# Altium PCB INA240_Breakout.PcbDoc
Units mil, origin at the board's own origin, x right, y up, seen from the top; angles counter-clockwise.
Board outline 1025 x 575 mil, 2 copper layers (Top Layer, Bottom Layer); 5 components, 7 nets, 19 pads, 0 vias.
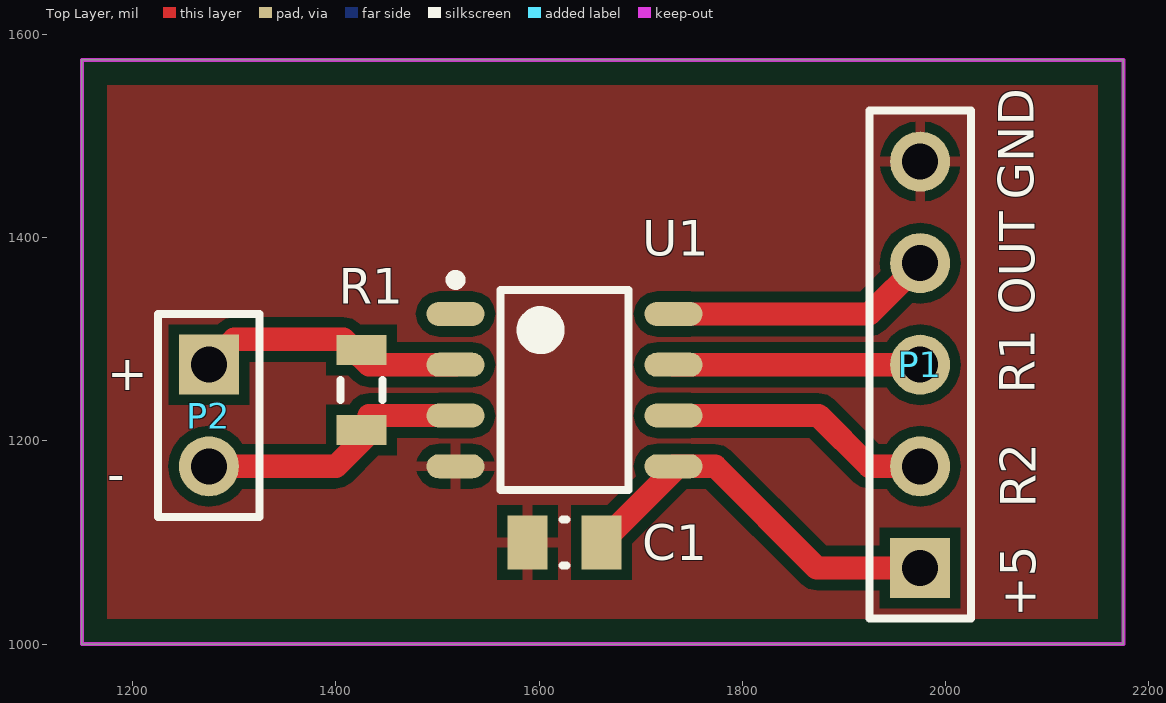
[diagram p0: Top Layer view]
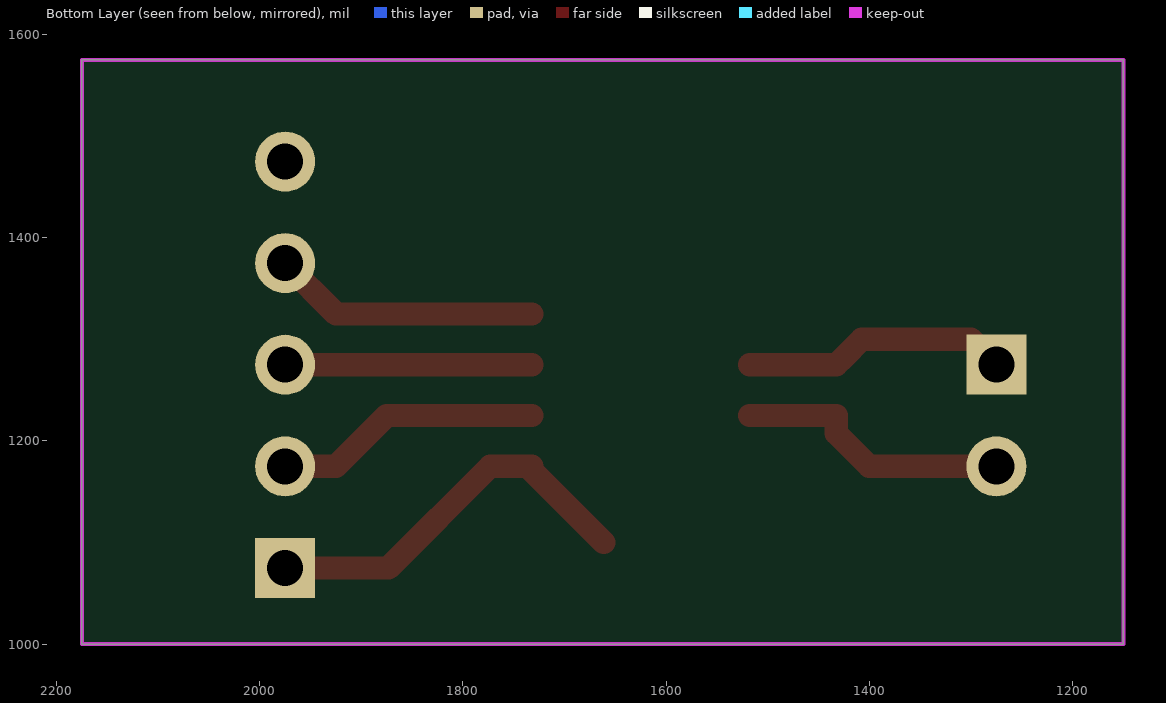
[diagram p1: Bottom Layer view, seen from below]
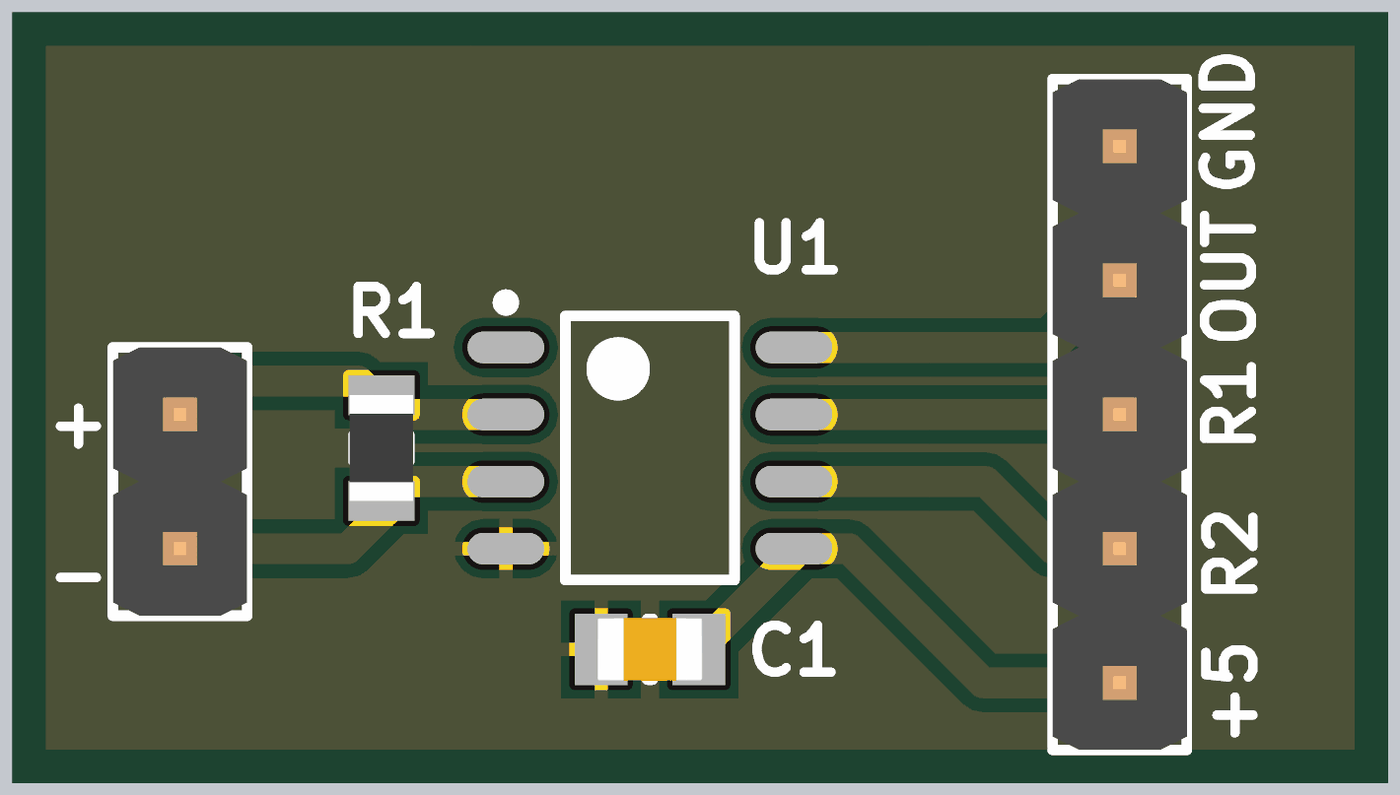
[diagram p2: 3D render of the assembled board from above, using the file's embedded part models]

## Layer stack, top to bottom
Top Solder: solder mask 0.4, Solder Resist, Dk 3.5
Top Layer: signal copper 1.4
Dielectric 1: dielectric 12.6, FR-4, Dk 4.8
Bottom Layer: signal copper 1.4
Bottom Solder: solder mask 0.4, Solder Resist, Dk 3.5

## Board outline
1150,1000 2175,1000 2175,1575 1150,1575

## Design rules (kind name [scope] priority, off if disabled: settings)
Clearance [All] p1: gap=10 ignorepadtopadclearanceinfootprint=FALSE except(0: Arc-Hole Track-Hole SMDPad-Hole THPad-Hole Via-Hole Fill-Hole Poly-Hole Region-Hole Text-Hole)
PolygonConnect [All] p1: connectstyle=Relief reliefconductorwidth=10 reliefentries=4 polygonreliefangle="90 Angle" airgapwidth=10
RoutingVias [All] p1: holewidth=28 width=50 viastyle="Through Hole" minholewidth=28 minwidth=50 maxholewidth=28 maxwidth=50
SolderMaskExpansion [All] p1: expansion=4 istentingtop=FALSE
Width [All] p1: maxlimit=50 minlimit=10 preferedwidth=10 minimp=50.000000 maximp=50.000000 favimp=50.000000
30 further rules are at their usual default settings.

## Components (designator, comment, footprint, x,y, rotation, side; value= is the part's Value field where it differs from the comment)
C1 "Capacitor - Nonpolarized" "0805 - Capacitor" 1625,1100 r0 top value=100nF
P1 "1x5 Header" HDR1X5 1975,1075 r90 top
P2 "1x2 Header" HDR1X2 1275,1275 r270 top
R1 "Resistor" "0805 - Resistor" 1425,1250 r270 top value=100m
U1 "INA240" INA240 1625,1250 r0 top

## Footprints (in the part's own frame and the unit in brackets; to place one, negate y for a bottom-side part, rotate by r counter-clockwise, add the part's x,y. Pads: shape width x height; smd on the part's side, far side on the other; paste and mask are expansions set on the pad)
"0805 - Capacitor" [mm] "0805 Chip Capacitor - IPC Medium Density"
  rect 1x1.35 smd: 1(-0.925,0) 2(0.925,0)
  silkscreen extent -0.05,-0.58 0.05,0.58, body extent -1,-0.6 1,0.6, height 1.2
"0805 - Resistor" [mm] "0805 Chip Resistor - IPC Medium Density"
  rect 0.75x1.25 smd: 1(-1,0) 2(1,0)
  silkscreen extent -0.25,-0.53 0.25,0.53, body extent -1,-0.6 1,0.6, height 0.5
HDR1X2 [mm] "Connector; Header; 2 Position"
  rect 1.5x1.5 hole 0.9: 1(0,0)
  round 1.5 hole 0.9: 2(2.54,0)
  silkscreen extent -1.27,-1.27 3.81,1.27, body extent -1.27,-1.27 3.81,1.27, height 8.54
HDR1X5 [mm] "Connector; Header; 5 Position"
  rect 1.5x1.5 hole 0.9: 1(0,0)
  round 1.5 hole 0.9: 2(2.54,0) 3(5.08,0) 4(7.62,0) 5(10.16,0)
  silkscreen extent -1.27,-1.27 11.43,1.27, body extent -1.27,-1.27 11.43,1.27, height 8.54
INA240 [mm] "SOIC, 8-Leads, Body 4.91x3.90mm, Pitch 1.27mm, IPC Medium Density"
  oval 1.45x0.6 smd: 1(-2.725,1.905) 2(-2.725,0.635) 3(-2.725,-0.635) 4(-2.725,-1.905) 5(2.725,-1.905) 6(2.725,-0.635) 7(2.725,0.635) 8(2.725,1.905)
  silkscreen extent -2.85,-2.5 1.6,2.88, body extent -2,-2.5 2,2.5, height 1.75

## Part data
C1: "Nonpolarized Capacitor", Manufacturer=Yageo, Manufacturer Part Number=CC0805KRX7R9BB104, Supplier Part Number=311-1140-1-ND
P1: "1x5 Pin Header"
P2: "1x2 Pin Header"
R1: Manufacturer=CTS, Manufacturer Part Number=73L3R10J, Supplier Part Number=73L3R10JCT-ND
U1: "-4V to 80V Current Sense Amplifier", Digikey Part Number=296-51173-1-ND, Manufacturer="Texas Instruments", Manufacturer Part Number=INA240A2DR, Datasheet=https://www.ti.com/lit/ds/sbos662b/sbos662b.pdf

## Nets (pads, with @x,y where several pads share a name; then routed paths per layer and width w, separated by ;. In a path a pad name is that pad's centre, name@x,y a point inside that pad or via, vN(x,y) a via of type N, cw(c..) or ccw(c..) an arc to the next point about the centre after c; other vN are vias at no path point)
+5: C1.2 P1.1 U1.5 | length 388.5
  Top Layer w23: C1.2 1732.28,1170.87 U1.5 1773.27,1175 1873.27,1075 P1.1
GND: C1.1 P1.5 U1.4
NetP1_4: P1.4 U1.8 | length 263.4
  Top Layer w23: U1.8 1925,1325 P1.4
NetP2_1: P2.1 R1.1 U1.2 | length 263.4
  Top Layer w23: P2.1 1300,1300 1407.48,1300 1425,1282.48 1432.48,1275 U1.2
NetP2_2: P2.2 R1.2 U1.3 | length 273.7
  Top Layer w23: P2.2 1400,1175 1432.48,1207.48 1432.48,1225 U1.3
REF1: P1.3 U1.7 | length 242.7
  Top Layer w23: U1.7 P1.3
REF2: P1.2 U1.6 | length 263.4
  Top Layer w23: U1.6 1875,1225 1925,1175 P1.2
pads on no net: U1.1

## Polygon pours and split planes (outlines as drawn)
GND on Top Layer "GND_L01_P000" (solid, pour order 0): 1175,1550 2150,1550 2150,1025 1175,1025
GND on Top Layer "GND_L01_P001" (solid, pour order 1): 850,1250

## Keep-outs
Keep-Out Layer:
  the board outline again, w3.94

## Silkscreen, mask and mechanical layers (free items; w line width, h text height)
Top Overlay:
  text "GND" at 2086.79,1437.31 h35 r90
  text "OUT" at 2087.77,1324.07 h35 r90
  text "+" at 1175,1250 h35
  text "R1" at 2087.77,1246.28 h35 r90
  text "-" at 1175,1150 h35
  text "R2" at 2088.76,1134.03 h35 r90
  text "+5" at 2088.76,1026.7 h35 r90